# Altium PCB EVB-A32S1-M_PCB1.PcbDoc (part 2 of 2)
Units mm, origin at the board's own origin, x right, y up, seen from the top; angles counter-clockwise.
Board outline 152.4 x 101.6 mm, 4 copper layers (L1 (Signal), L2 (GND), L3 (PWR), L4 (Signal)), stack 1.553 mm thick; 111 components, 86 nets, 392 pads, 0 vias.
Unrouted connection lines stored in the file: 269.
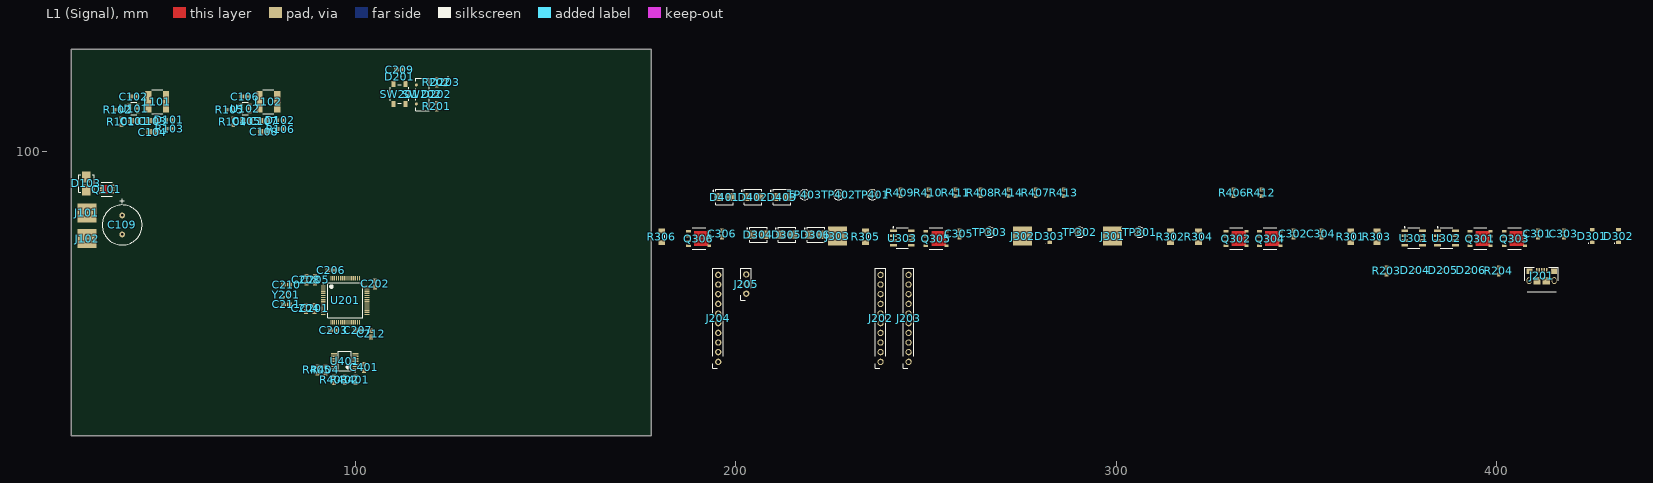
[diagram p0: L1 (Signal) view]

## Nets (pads, with @x,y where several pads share a name; then routed paths per layer and width w, separated by ;. In a path a pad name is that pad's centre, name@x,y a point inside that pad or via, vN(x,y) a via of type N, cw(c..) or ccw(c..) an arc to the next point about the centre after c; other vN are vias at no path point) (continued)
+5V: C107.2 C108.2 C401.2 D102.2 J202.1 L102.2 R401.2 R402.2 R403.2 U102.1 U401.3
+VBAT: D103.1 J101.1 Q101.5 Q101.6 Q101.7 Q101.8
+VCC: C101.2 C105.2 C109.1 C301.2 C303.2 C305.2 D301.2 D302.2 D303.2 Q101.1 Q101.2 Q101.3 Q301.5 Q301.6 Q301.7 Q301.8 Q303.5 Q303.6 Q303.7 Q303.8 Q305.5 Q305.6 Q305.7 Q305.8 R101.2 R104.2 U101.3 U102.3 U301.1 U302.1 U303.1
BEMF_A: R406.2 R411.2 R412.1 U401.7
BEMF_B: R407.2 R410.2 R413.1 U401.5
BEMF_C: R408.2 R409.2 R414.1 U401.9
BOOT0: R201.2 U201.60
COM: D401.1 D402.1 D403.1 R406.1 R407.1 R408.1 TP401.1 TP402.1 TP403.1 U401.4 U401.6 U401.8
GHO_A: Q301.4 R301.2
GHO_B: Q303.4 R303.2
GHO_C: Q305.4 R305.2
GLO_A: Q302.4 R302.2
GLO_B: Q304.4 R304.2
GLO_C: Q306.4 R306.2
GND: C101.1 C103.1 C104.1 C105.1 C107.1 C108.1 C109.2 C201.1 C202.1 C203.1 C204.1 C205.1 C206.1 C207.1 C208.1 C209.1 C210.1 C211.1 C212.1 C301.1 C303.1 C305.1 C401.1 D103.2 D201.2 D202.2 D204.2 D205.2 D206.2 D304.2 D305.2 D306.2 D401.2 D402.2 D403.2 J102.1 J201.5 J202.3 J202.4 Q101.4 Q302.1 Q302.2 Q302.3 Q304.1 Q304.2 Q304.3 Q306.1 Q306.2 Q306.3 R102.1 R103.1 R105.1 R106.1 R202.1 R203.1 R404.1 R405.1 R409.1 R410.1 R411.1 SW201.3 SW201.4 SW202.1 U101.4 U102.4 U201.12 U201.18 U201.31 U201.47 U201.63 U301.4 U302.4 U303.4 U401.12 Y201.2 Y201.4
HIN_A: U201.43 U301.2
HIN_B: U201.42 U302.2
HIN_C: U201.41 U303.2
HO_A: R301.1 U301.7
HO_B: R303.1 U302.7
HO_C: R305.1 U303.7
LIN_A: U201.36 U301.3
LIN_B: U201.35 U302.3
LIN_C: U201.34 U303.3
LO_A: R302.1 U301.5
LO_B: R304.1 U302.5
LO_C: R306.1 U303.5
NRST: C209.2 D201.1 SW201.1 SW201.2 U201.7
OSC_IN: C210.2 U201.5 Y201.1
OSC_OUT: C211.2 U201.6 Y201.3
PA0: J204.1 U201.14
PA1: J204.2 U201.15
PA2: J204.3 U201.16
PA3: J204.4 U201.17
PA4: J204.5 U201.20
PA5: J204.6 U201.21
PA6: J204.7 U201.22
PA7: J204.8 U201.23
PB4: J202.5 U201.56
PB5: J202.6 U201.57
PB6: J202.7 U201.58
PB7: J202.8 U201.59
PB8: J202.9 U201.61
PB9: J202.10 U201.62
PC0: J203.1 U201.8
PC1: J203.2 U201.9
PC2: J203.3 U201.10
PC3: J203.4 U201.11
PC4: J203.5 U201.24
PC5: J203.6 U201.25
PC10: J203.7 U201.51
PC13: J203.8 U201.2
PC14: J203.9 U201.3
PC15: J203.10 U201.4
PD2: J204.10 U201.54
PHASE_A: C302.1 D304.1 J301.1 Q301.1 Q301.2 Q301.3 Q302.5 Q302.6 Q302.7 Q302.8 R412.2 TP301.1 U301.6
PHASE_B: C304.1 D305.1 J302.1 Q303.1 Q303.2 Q303.3 Q304.5 Q304.6 Q304.7 Q304.8 R413.2 TP302.1 U302.6
PHASE_C: C306.1 D306.1 J303.1 Q305.1 Q305.2 Q305.3 Q306.5 Q306.6 Q306.7 Q306.8 R414.2 TP303.1 U303.6
PROG_LED: D203.2 U201.53
PROG_LED_K: D203.1 R202.2
SENSE_A: R401.1 U201.29 U401.1
SENSE_B: R402.1 U201.28 U401.2
SENSE_C: R403.1 U201.27 U401.14
SW_BOOT0: D202.1 R201.1 SW202.2
SW_CLK: J205.2 U201.49
SW_IO: J205.1 U201.46
SW_O: J205.3 U201.55
USB_D_N: D205.1 J201.2 U201.44
USB_D_P: D206.1 J201.3 U201.45
VB_A: C302.2 D301.1 U301.8
VB_B: C304.2 D302.1 U302.8
VB_C: C306.2 D303.1 U303.8
VBUS: D204.1 J201.1 R204.2
VBUS_SENSE: R203.2 R204.1 U201.50
VCAP: C212.2 U201.30
pads on no net: J201.4 J201.6 J201.7 J201.8 J201.9 J201.10 J201.11 J204.9 U201.26 U201.33 U201.37 U201.38 U201.39 U201.40 U201.52 U401.13

## Polygon pours and split planes (outlines as drawn)
no net on L2 (GND) (split plane): 177.29,25.91 25.91,25.91 25.91,126.49 177.29,126.49
no net on L3 (PWR) (split plane): 177.29,25.91 25.91,25.91 25.91,126.49 177.29,126.49